# EAGLE board RingShield (EAGLE 9.6.2)
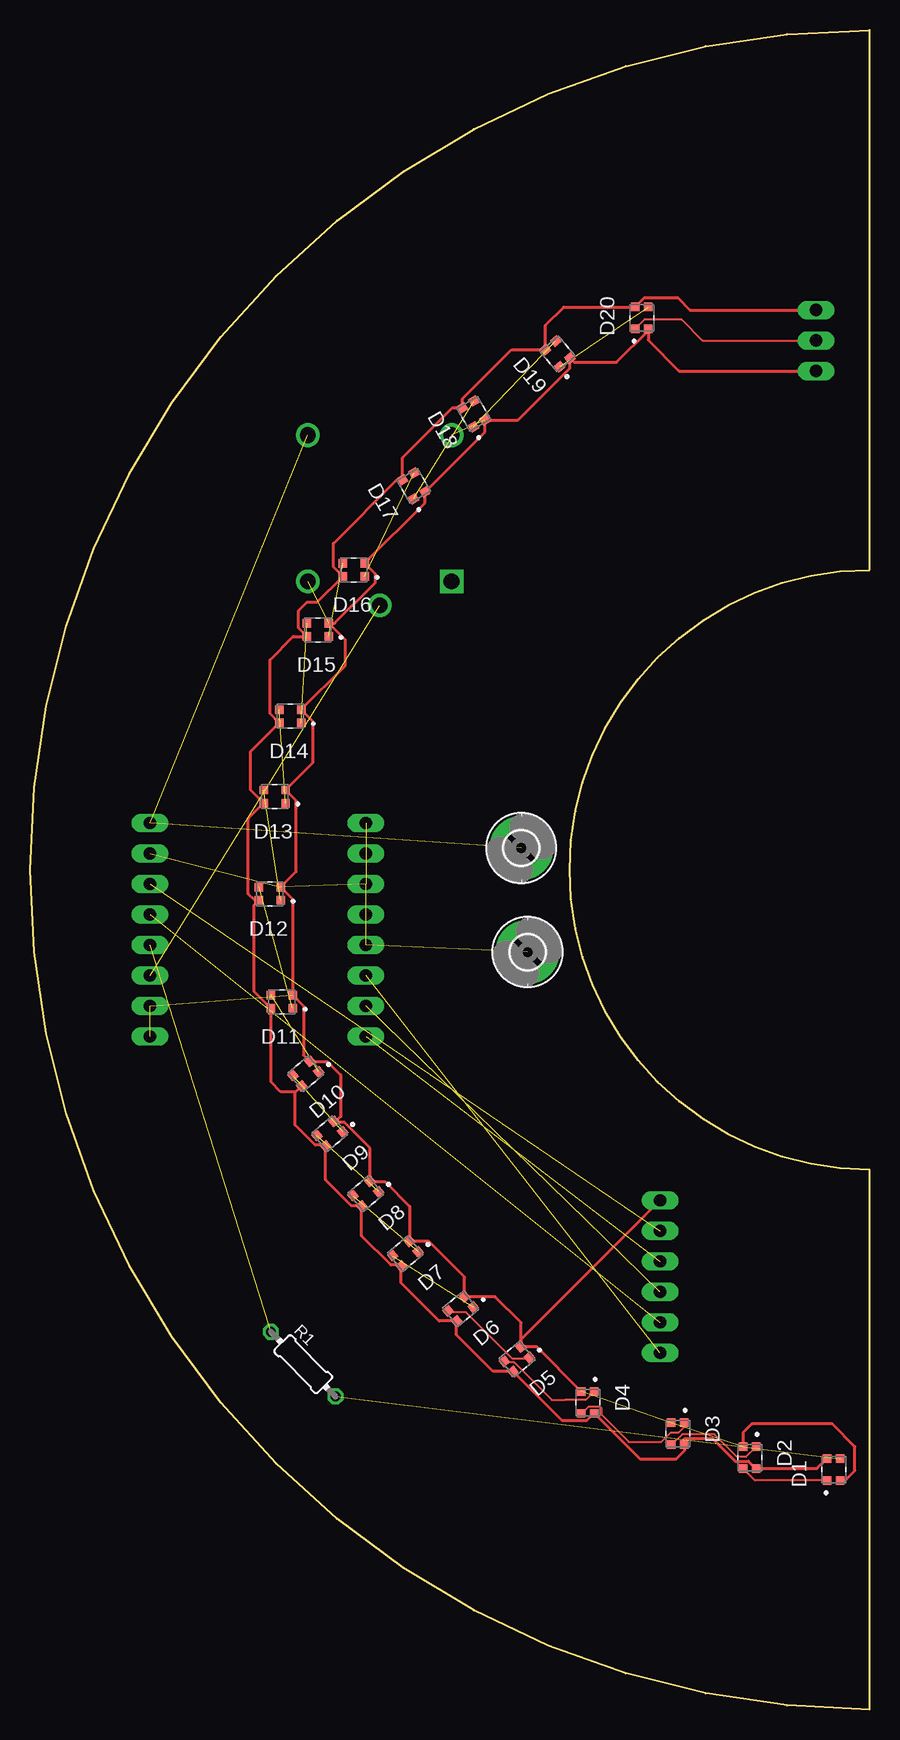
[diagram p0: board, top side]
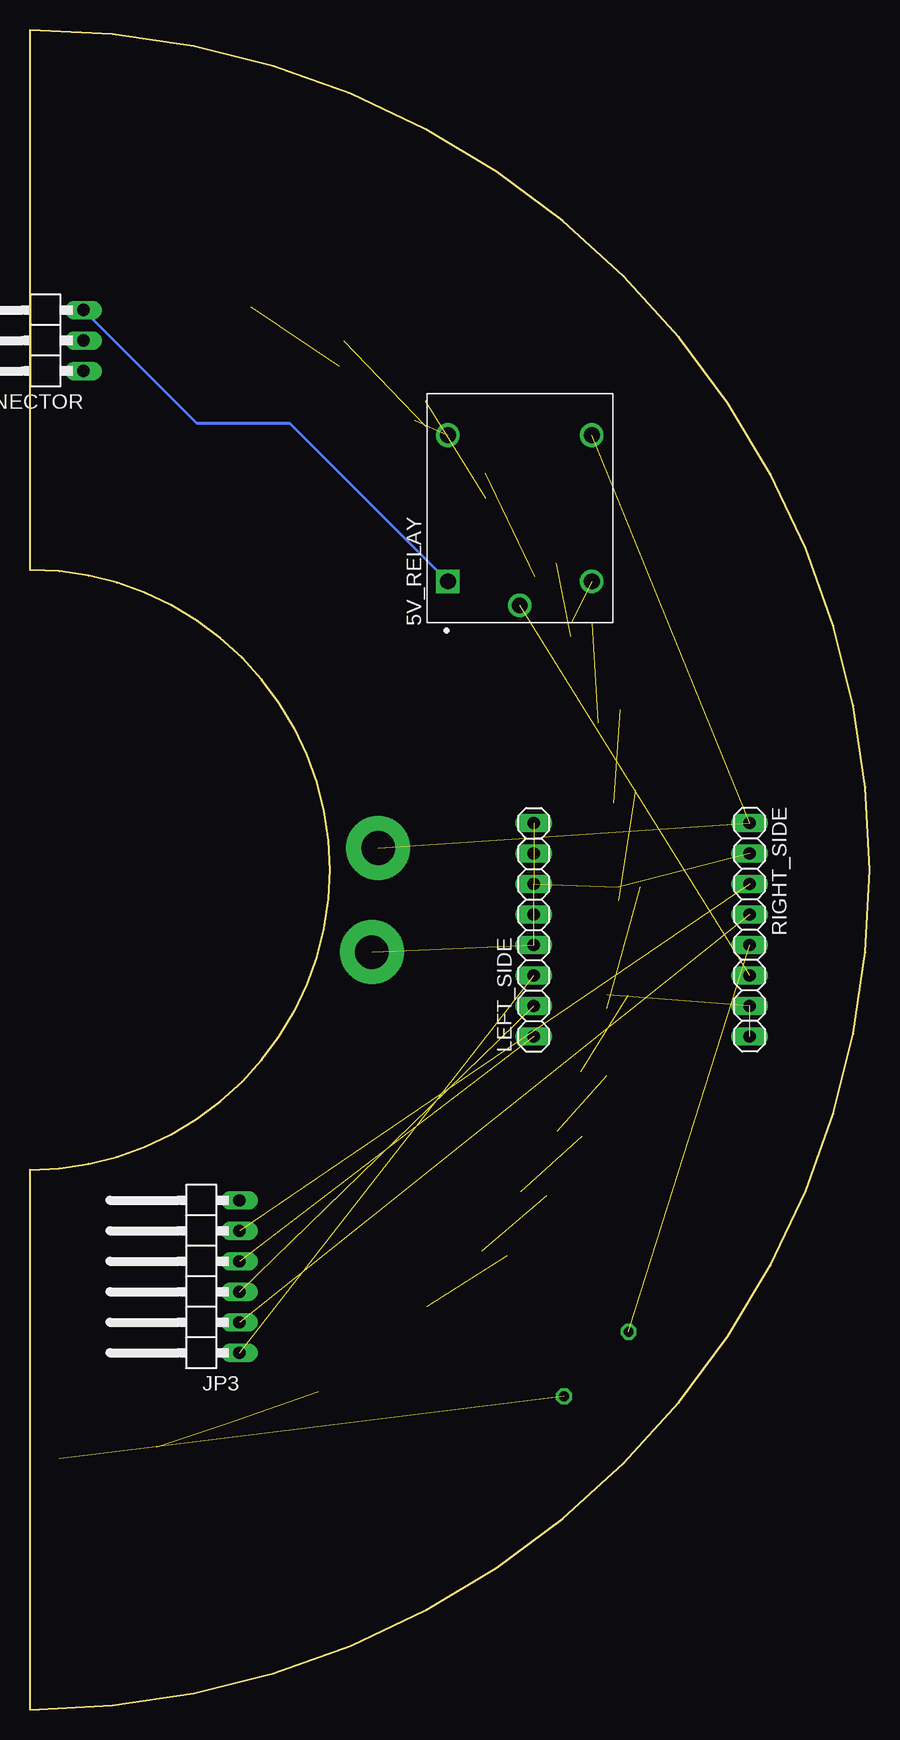
[diagram p1: board, bottom side, seen from below]

Size 70 x 140 mm. Coordinates in mm from the lower left corner, seen from the top.
Outline: 70,45 arc-180 70,95 70,140 arc180 70,0 70,45
Copper layers (1*16): Top 0.035mm / dielectric 1.5mm / Bottom 0.035mm
Design rules "default": minimum track width 6mil, minimum drill 0.35mm, track to track 6mil, track to pad 6mil, pad to pad 6mil, via to via 6mil, smd to smd 6mil, copper to edge 40mil, drill to drill 6mil, minimum pad ring 10mil, minimum via ring 8mil, stop-mask expansion 4mil, vias tented up to drill 0mil, thermal gap 10mil

## Footprints (pad centres in the part's own frame; a part is rotated, then mirrored left to right if it is on the bottom)
RELAY_SRD-05VDC-SL-C = drill 1.32 square: A1 -6.1,6 | drill 1.32: A2 -6.1,-6; NC 6.1,6; NO 6.1,-6 | drill 1.29: COM -8.1,0
LED_WS2812B2020 = smd 0.7 x 0.7: 1 -0.915,0.55; 2 -0.915,-0.55; 3 0.915,-0.55; 4 0.915,0.55
2,8-PAD = drill 2.8 pad 5.334: B2,8 0,0
1X06/90 = drill 1.016 long: 1 -6.35,-3.81; 2 -3.81,-3.81; 3 -1.27,-3.81; 4 1.27,-3.81; 5 3.81,-3.81; 6 6.35,-3.81
1X08 = drill 1.016 long: 1 -8.89,0; 2 -6.35,0; 3 -3.81,0; 4 -1.27,0; 5 1.27,0; 6 3.81,0; 7 6.35,0; 8 8.89,0
1X03/90 = drill 1.016 long: 1 -2.54,-3.81; 2 0,-3.81; 3 2.54,-3.81
0204/7 = drill 0.813 octagon: 1 -3.81,0; 2 3.81,0

## Placement (x,y rotation side)
5V_RELAY  SRD-05VDC-SL-C  [RELAY_SRD-05VDC-SL-C]  29.16,100.14 90 bottom
D1  WS2812B2020  [LED_WS2812B2020]  67,20 90 top
D2  WS2812B2020  [LED_WS2812B2020]  60,21 270 top
D3  WS2812B2020  [LED_WS2812B2020]  54,23 270 top
D4  WS2812B2020  [LED_WS2812B2020]  46.5,25.6 270 top
D5  WS2812B2020  [LED_WS2812B2020]  40.6,29.2 220 top
D6  WS2812B2020  [LED_WS2812B2020]  35.9,33.4 220 top
D7  WS2812B2020  [LED_WS2812B2020]  31.3,38 220 top
D8  WS2812B2020  [LED_WS2812B2020]  28,43 220 top
D9  WS2812B2020  [LED_WS2812B2020]  25,48 220 top
D10  WS2812B2020  [LED_WS2812B2020]  23,53 220 top
D11  WS2812B2020  [LED_WS2812B2020]  21,59 180 top
D12  WS2812B2020  [LED_WS2812B2020]  20,68 180 top
D13  WS2812B2020  [LED_WS2812B2020]  20.4,76.1 180 top
D14  WS2812B2020  [LED_WS2812B2020]  21.7,82.8 180 top
D15  WS2812B2020  [LED_WS2812B2020]  24,90 180 top
D16  WS2812B2020  [LED_WS2812B2020]  27,95 180 top
D17  WS2812B2020  [LED_WS2812B2020]  32,102 120 top
D18  WS2812B2020  [LED_WS2812B2020]  37,108 120 top
D19  WS2812B2020  [LED_WS2812B2020]  44,113 130 top
D20  WS2812B2020  [LED_WS2812B2020]  51,116 90 top
H3  MOUNT-PAD-ROUND2.8  [2,8-PAD]  40.96,71.81 0 top
H4  MOUNT-PAD-ROUND2.8  [2,8-PAD]  41.49,63.13 0 top
JP3  [1X06/90]  56.35,36.09 90 bottom
LEFT_SIDE  [1X08]  28,65 90 bottom
PCB_CONNECTOR  [1X03/90]  69.35,114.12 90 bottom
R1  330  [0204/7]  22.78,28.79 315 top
RIGHT_SIDE  [1X08]  10,65 270 bottom

## Library data of the parts
5V_RELAY = SRD-05VDC-SL-C; AVAILABILITY: In Stock; CHECK_PRICES: https://www.snapeda.com/parts/SRD-05VDC-SL-C/Songle+Relay/view-part/?ref=eda; DESCRIPTION: 5V Trigger Relay Module For Arduino And Raspberry Pi 5V Trigger Relay Module For Arduino And Raspberry Pi; MF: Songle Relay; MP: SRD-05VDC-SL-C; PACKAGE: NON STANDARD-5 Songle Relay; PRICE: None; SNAPEDA_LINK: https://www.snapeda.com/parts/SRD-05VDC-SL-C/Songle+Relay/view-part/?ref=snap
D1-D20 = WS2812B2020; AVAILABILITY: In Stock; CHECK_PRICES: https://www.snapeda.com/parts/WS2812B2020/Worldsemi/view-part/?ref=eda; DESCRIPTION: LED; SMD; 2020; RGB; 2x2x0.84mm; 3.7÷5.3V; Lens: transparent; 2kHz; MF: WorldSemi; MP: WS2812B2020; PACKAGE: None; PRICE: None; SNAPEDA_LINK: https://www.snapeda.com/parts/WS2812B2020/Worldsemi/view-part/?ref=snap
H3 H4 = holes
JP3 LEFT_SIDE PCB_CONNECTOR RIGHT_SIDE = pinhead
R1 = rcl; SPICEPREFIX: R

## Nets
+3V3: JP3.5 RIGHT_SIDE.3
+5V: 5V_RELAY.A1 D1.4 D2.4 D3.4 D4.4 D5.4 D6.4 D7.4 D8.4 D9.4 D10.4 D11.4 D12.4 D13.4 D14.4 D15.4 D16.4 D17.4 D18.4 D19.4 D20.4 PCB_CONNECTOR.3
CMD: 5V_RELAY.COM RIGHT_SIDE.6
CS: JP3.1 LEFT_SIDE.3
DIN: R1.1 RIGHT_SIDE.5
DO: D20.1 PCB_CONNECTOR.2
GND: 5V_RELAY.A2 5V_RELAY.NC D1.2 D2.2 D3.2 D4.2 D5.2 D6.2 D7.2 D8.2 D9.2 D10.2 D11.2 D12.2 D13.2 D14.2 D15.2 D16.2 D17.2 D18.2 D19.2 D20.2 H4.B2,8 JP3.6 LEFT_SIDE.4 LEFT_SIDE.5 LEFT_SIDE.6 LEFT_SIDE.7 LEFT_SIDE.8 PCB_CONNECTOR.1 RIGHT_SIDE.2 RIGHT_SIDE.7 RIGHT_SIDE.8
MISO: JP3.4 LEFT_SIDE.1
MOSI: JP3.3 LEFT_SIDE.2
N$1: D1.3 R1.2
N$2: D1.1 D2.3
N$3: D2.1 D3.3
N$4: D3.1 D4.3
N$5: D4.1 D5.3
N$6: D5.1 D6.3
N$7: D18.1 D19.3
N$9: D9.1 D10.3
N$10: D8.1 D9.3
N$11: D7.1 D8.3
N$12: D6.1 D7.3
N$13: D14.1 D15.3
N$14: D13.1 D14.3
N$15: D12.1 D13.3
N$16: D11.1 D12.3
N$17: D10.1 D11.3
N$19: D17.1 D18.3
N$20: D16.1 D17.3
N$21: D15.1 D16.3
N$22: D19.1 D20.3
SCK: JP3.2 RIGHT_SIDE.4
VIN: 5V_RELAY.NO H3.B2,8 RIGHT_SIDE.1

## Tracks (layer width: path | path; a pad name or v marks a point on that pad's centre or on a via)
+3V3  (1 unrouted)
+5V
  Top 0.24: D1.4 65.62,20.09 D2.4 60.53,20.09 59.91,20.71 58.79,20.71 56.9,22.6 54.6,22.6 54.55,22.55 D3.4 54.55,21.55 53.9,20.9 50.84,20.9 D4.4 47.03,24.68 46.41,24.06 44.38,24.06 D5.4 38.61,28.19 35.55,31.25 D6.4 34.11,32.39 30.95,35.55 D7.4 30.88,37.06 30.09,37.06 27.65,39.49 D8.4 26.81,41.99 24.65,44.15 D9.4 24.58,47.06 23.79,47.06 22.14,48.7 22.1,48.7 22.1,51.44 D10.4 22.16,51.5 20.9,51.5 20.09,52.31 D11.4 18.7,59.84 18.7,67.06 D12.4 18.75,67.45 18.2,68 18.2,74.27 D13.4 18.4,76.64 18.4,79.86 D14.4 20,83.03 20,87.5 21.95,89.45 D15.4 22.4,90.14 22.4,91.6 23.1,92.3 23.93,92.3 D16.4 25.3,95.23 25.3,97.2 30.62,102.52 D17.4 31.07,104.37 35.22,108.52 D18.4 36.07,109.27 40.15,113.35 D19.4 42.99,115.39 44.52,116.92 D20.4 51.23,117.7 54,117.7 55.04,116.66 PCB_CONNECTOR.3
  Bottom 0.24: 5V_RELAY.A1 48.32,107.2 56.08,107.2 PCB_CONNECTOR.3
CMD  (1 unrouted)
CS  (1 unrouted)
DIN  (1 unrouted)
DO
  Top 0.16: D20.1 51.27,115.9 54.3,115.9 56.08,114.12 PCB_CONNECTOR.2
GND  (13 unrouted)
  Top 0.24: D1.2 67.97,19.09 68.79,19.9 68.79,21.91 66.9,23.8 60.2,23.8 59.45,23.05 D2.2 | D4.2 42.26,30.21 D5.2 | D5.2 40.95,32.25 38.79,34.41 D6.2 36.25,36.05 33.29,39.01 D7.2 31.65,41.95 29.59,44.01 D8.2 28.35,46.81 26.21,48.94 25.42,48.94 | JP3.6 40.95,30.85 D5.2 | 25.42,48.94 D9.2 | 25.42,48.94 25.9,49.42 25.9,52.9 24.79,54.01 D10.2 22.8,54.56 22.8,58.66 D11.2 21.91,67.55 D12.2 22.2,69.83 22.2,75.77 D13.2 23.6,78.94 23.6,82.36 D14.2 26.3,87.03 26.3,89.17 D15.2 25.41,90.55 28.8,93.94 28.8,94.67 D16.2 32.93,100.57 D17.2 37.93,106.48 D18.2 40.68,107.48 45.01,111.81 D19.2 45.36,112.3 48.9,112.3 51.55,114.95 D20.2 51.55,114.15 54.12,111.58 PCB_CONNECTOR.1
MISO  (1 unrouted)
MOSI  (1 unrouted)
N$1  (1 unrouted)
N$2
  Top 0.16: D1.1 60.45,19.09 D2.3
  Top 0.24: 59.45,19.95 D2.3
N$3
  Top 0.16: D2.1 59.7,21.06 58.94,21.06 57.05,22.95 54.39,22.95 53.52,22.09 D3.3
  Top 0.24: D2.1 60.53,21.91
N$4
  Top 0.16: D4.3 46.02,24.68 46.6,25.27 47.5,25.27 47.63,25.13 47.63,24.6 49.93,22.3 52.64,22.3 53.44,23.1 54.09,23.1 54.55,23.55 D3.1
N$5
  Top 0.16: D4.1 46.34,25.8 44.7,25.8 44.6,25.8 43.52,25.8 42.42,26.9 42.36,26.96 40.4,28.92 39.66,28.92 D5.3
N$6
  Top 0.16: D5.1 41.52,29.24 40.24,29.24 36.36,33.12 34.95,33.12 D6.3
N$7  (1 unrouted)
N$9  (1 unrouted)
N$10  (1 unrouted)
N$11  (1 unrouted)
N$12  (1 unrouted)
N$13  (1 unrouted)
N$14  (1 unrouted)
N$15  (1 unrouted)
N$16  (1 unrouted)
N$17  (1 unrouted)
N$19  (1 unrouted)
N$20  (1 unrouted)
N$21  (1 unrouted)
N$22  (1 unrouted)
SCK  (1 unrouted)
VIN  (2 unrouted)